# Altium PCB final049..PcbDoc
Units mm, origin at the board's own origin, x right, y up, seen from the top; angles counter-clockwise.
Board outline 152.4 x 101.6 mm, 2 copper layers (Top Layer, Bottom Layer); 18 components, 46 nets, 149 pads, 0 vias.
Unrouted connection lines stored in the file: 6.
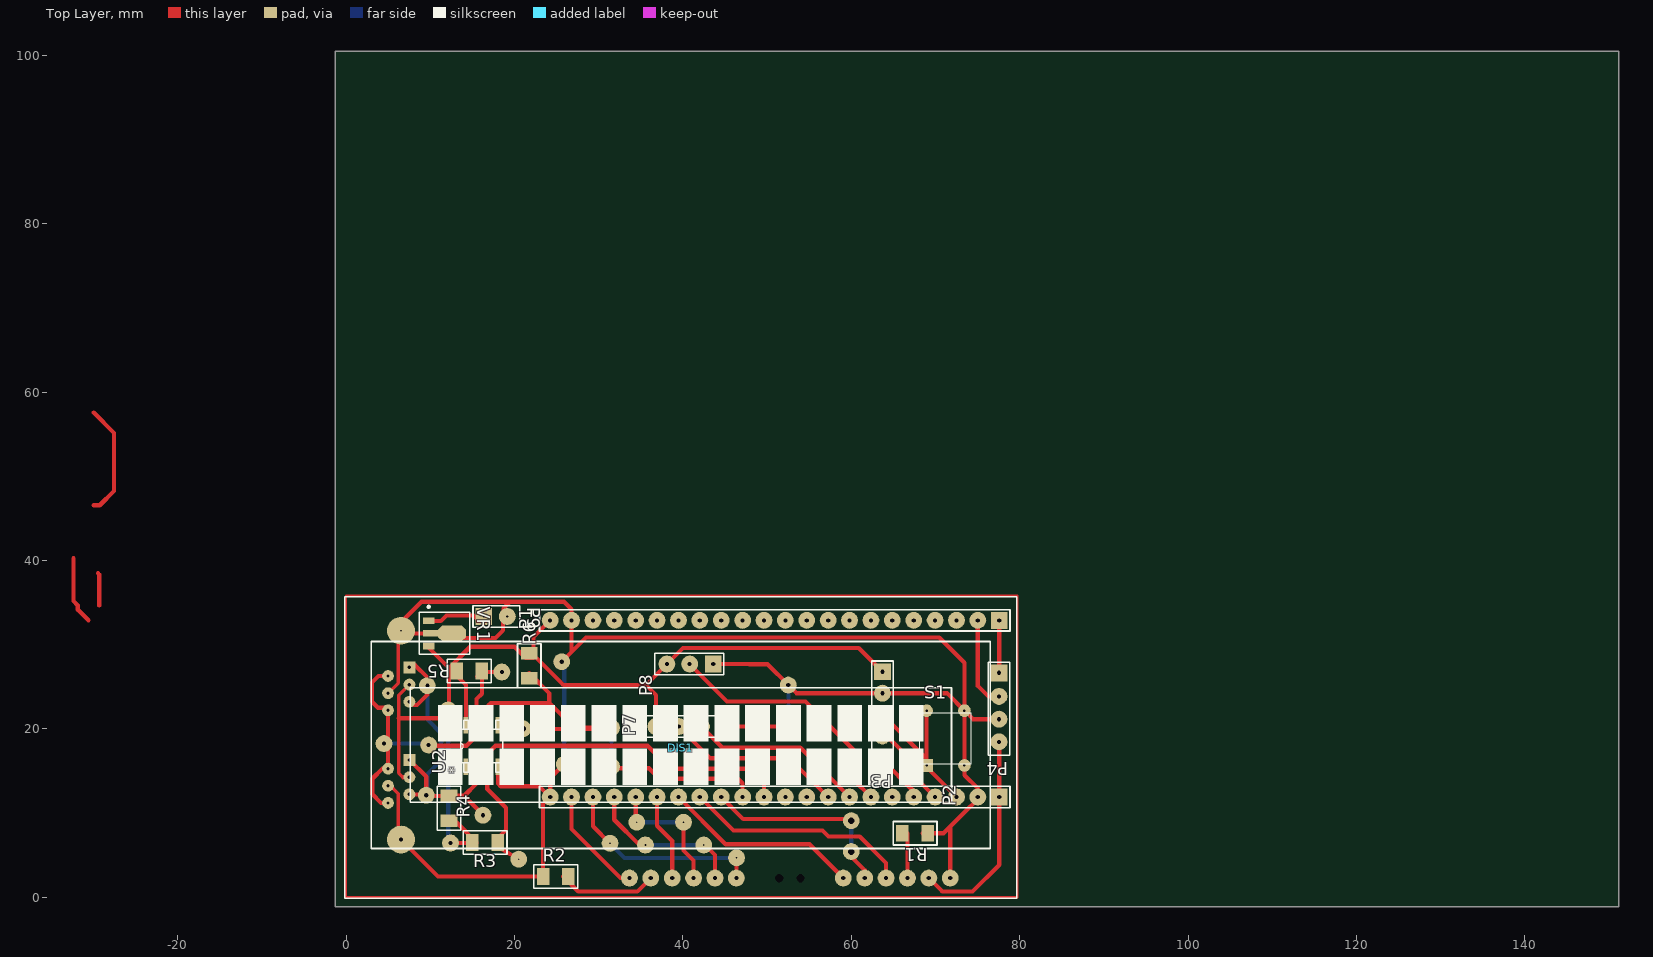
[diagram p0: Top Layer view]
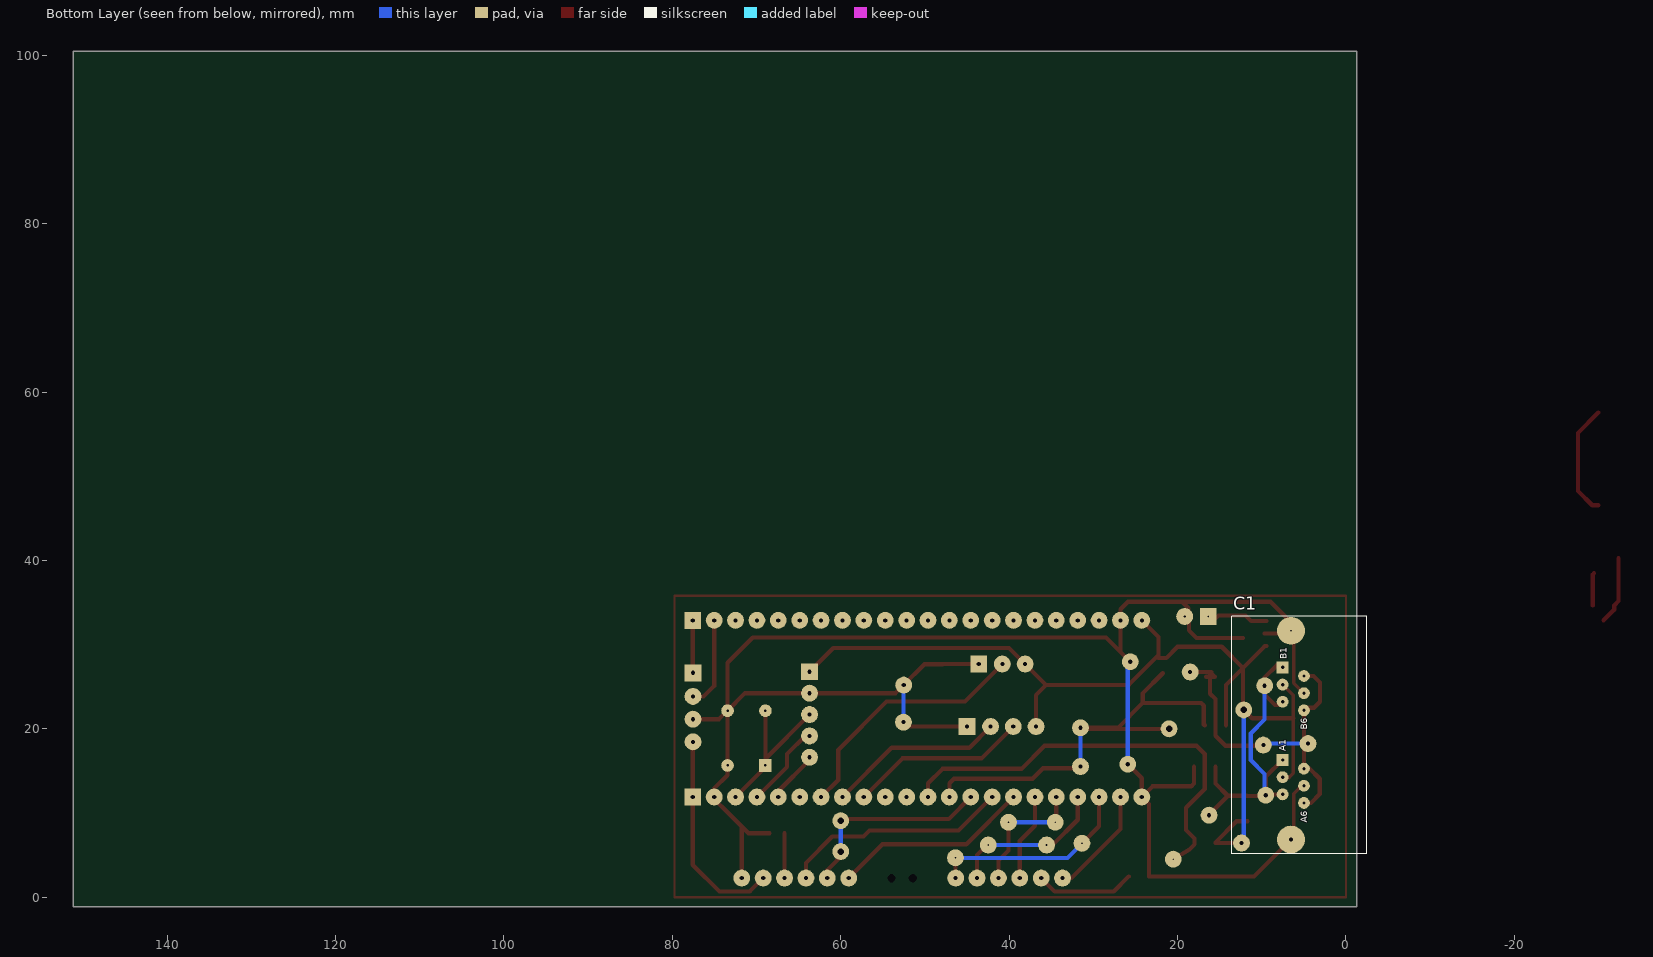
[diagram p1: Bottom Layer view, seen from below]

## Layer stack, top to bottom
Top Solder: solder mask 0.0102, Solder Resist, Dk 3.5
Top Layer: signal copper 0.0356
Dielectric 1: dielectric 0.32, FR-4, Dk 4.8
Bottom Layer: signal copper 0.0356
Bottom Solder: solder mask 0.0102, Solder Resist, Dk 3.5

## Board outline
-1.27,-1.143 151.13,-1.143 151.13,100.457 -1.27,100.457

## Design rules (kind name [scope] priority, off if disabled: settings)
Clearance [All] p1: gap=0.254
PolygonConnect [All] p1: connectstyle=Relief reliefconductorwidth=0.254 reliefentries=4 polygonreliefangle="90 Angle" airgapwidth=0.254
RoutingVias [All] p1: holewidth=0.711 width=1.27 viastyle="Through Hole" minholewidth=0.711 minwidth=1.27 maxholewidth=0.711 maxwidth=1.27
SolderMaskExpansion [All] p1: expansion=0.102
Width [All] p1: maxlimit=1 minlimit=0.254 preferedwidth=0.5 minimp=50.000000 maximp=50.000000 favimp=50.000000
30 further rules are at their usual default settings.

## Components (designator, comment, footprint, x,y, rotation, side; value= is the part's Value field where it differs from the comment)
C1 "" 615012149421 6.25,19.25 r90 bottom locked
DIS1 "Tuxgraphics LCD display 16x2 characters reflective, without background light   Source: tuxgr_12x2_r2.pdf" TUXGR_16X2_R2 39.751,17.78 r180 top locked
P1 "Header 22" HDR1X22 77.573,32.887 r180 top locked
P2 "Header 22" HDR1X22 77.573,11.907 r180 top locked
P3 "Header 5" HDR1X5 63.702,26.779 r270 top
P4 "UART" HDR1X4 77.545,26.652 r270 top
P7 "HC" HDR1X4 45,20.275 r180 top
P8 "LM" HDR1X3 43.6,27.7 r180 top
P9 "VIN" HDR1X2 16.35,33.35 r0 top
R1 "R" R1206-0.55 67.575,7.6 r180 top
R2 "R" R1206-0.55 24.9,2.45 r0 top
R3 "R" R1206-0.55 16.5,6.5 r180 top
R4 "R" R1206-0.55 12.225,10.575 r270 top
R5 "R" R1206-0.55 14.625,26.875 r180 top
R6 "R" R1206-0.55 21.75,27.5 r90 top
S1 "" 4301x60437x6 71.195,18.905 r90 top
U2 "P82B715_D_8" D8 16.129,17.953 r90 top
VR1 "Volt Reg" SOT89/X.8 11.2,31.35 r270 top

## Footprints (in the part's own frame and the unit in brackets; to place one, negate y for a bottom-side part, rotate by r counter-clockwise, add the part's x,y. Pads: shape width x height; smd on the part's side, far side on the other; paste and mask are expansions set on the pad)
4301x60437x6 [mm] "6*6mm vertical type, THT, height 4.3mm, salmon actuator 360gf, Bulk"
  rect 1.5x1.5 hole 0.3: 1(-3.25,2.25)
  round 1.5 hole 0.3: 2(-3.25,-2.25) 3(3.25,2.25) 4(3.25,-2.25)
  silkscreen extent -3.04,-3.04 3.04,3.04, body extent -3.95,-3.1 3.95,3.1, height 4.31
615012149421 [mm] "WR-MJ_Modular Jack_Tab UP_6P6C  Pre-Assembly 1x2"
  rect 1.4x1.4 hole 0.4: A1(-2.95,1.27) B1(8.05,1.27)
  round 1.4 hole 0.4: A2(-3.97,-1.27) A3(-4.99,1.27) A4(-6.01,-1.27) A5(-7.03,1.27) A6(-8.05,-1.27) B2(7.03,-1.27) B3(6.01,1.27) B4(4.99,-1.27) B5(3.97,1.27) B6(2.95,-1.27)
  round 3.3 hole 0.5: Z1(-12.4,0.27)
  round 3.3 hole 0.2: Z2(12.4,0.27)
  round 2.8 smd: ""(-12.4,0.27)
  silkscreen extent -14.1,-8.7 14.1,7.3, body extent -14.1,-8.7 14.01,7.3, height 15.41
D8 [mil]
  rect 78x22 smd: 1(-97,75) 2(-97,25) 3(-97,-25) 4(-97,-75) 5(97,-75) 6(97,-25) 7(97,25) 8(97,75)
  silkscreen extent -122,-98 122,99
HDR1X2 [mm] "Connector; Header; 2 Position"
  rect 2x2 hole 0.2: 1(0,0)
  round 2 hole 0.27: 2(2.8,0)
  silkscreen extent -1.27,-1.27 4.28,1.27
HDR1X3 [mm] "Connector; Header; 3 Position"
  rect 2x2 hole 0.5: 1(0,0)
  round 2 hole 0.5: 2(2.8,0) 3(5.5,0)
  silkscreen extent -1.27,-1.27 6.95,1.27
HDR1X4 [mm] "Connector; Header; 4 Position"
  rect 2x2 hole 0.5: 1(0,0)
  round 2 hole 0.5: 2(2.8,0) 3(5.5,0) 4(8.2,0)
  silkscreen extent -1.27,-1.27 9.77,1.27
HDR1X5 [mm] "Connector; Header; 5 Position"
  rect 2x2 hole 0.5: 1(0,0)
  round 2 hole 0.5: 2(2.54,0) 3(5.08,0) 4(7.62,0) 5(10.16,0)
  silkscreen extent -1.27,-1.27 11.43,1.27
HDR1X22 [mm] "Connector; Header; 22 Position"
  rect 2x2 hole 0.5: 1(0,0)
  round 2 hole 0.5: 2(2.54,0) 3(5.08,0) 4(7.62,0) 5(10.16,0) 6(12.7,0) 7(15.24,0) 8(17.78,0) 9(20.32,0) 10(22.86,0) 11(25.4,0) 12(27.94,0) 13(30.48,0) 14(33.02,0) 15(35.56,0) 16(38.1,0) 17(40.64,0) 18(43.18,0) 19(45.72,0) 20(48.26,0) 21(50.8,0) 22(53.34,0)
  silkscreen extent -1.27,-1.27 54.61,1.27
R1206-0.55 [mm] "Resistor Chip 1206 Height 0.55mm"
  rect 1.5x2 smd: 1(-1.5,0) 2(1.5,0)
  silkscreen extent -2.6,-1.4 2.6,1.4, body extent -1.6,-0.8 1.6,0.8, height 0.56
SOT89/X.8 [mm] "SOT-89; Body 4.6 x 4.25 mm, inc. leads (LxW max)"
  oct 1.85x3.3 smd: 0(0,1.388)
  rect 0.8x1.35 smd: 1(-1.5,-1.388) 3(1.5,-1.388)
  rect 0.75x1.8 smd: 2(0,-1.163)
  silkscreen extent -3.27,-2.51 2.5,3.49
TUXGR_16X2_R2 [mm]
  rect 0x0 on Mech1: 1(-37.5,-15.5) 1(-37.5,15.5) 1(37.5,-15.5) 1(37.5,15.5) 7(-16.76,15.5) 10(-9.14,15.5)
  round 2 hole 0.5: 1(-32,15.5) 2(-29.46,15.5) 3(-26.92,15.5) 4(-24.38,15.5) 5(-21.84,15.5) 6(-19.3,15.5) 11(-6.6,15.5) 12(-4.06,15.5) 13(-1.52,15.5) 14(1.02,15.5) 15(3.56,15.5) 16(6.1,15.5)
  round 0 hole 1: 8(-14.22,15.5) 9(-11.68,15.5)
  silkscreen extent -39.9,-17.9 39.9,17.9

## Part data
C1: library part "WE-Modular Jack 615012149421", "WR-MJ_Modular Jack_Tab UP_6P6C"
DIS1: library part TUXGR_16X2_R2
P1 P2: "Header, 22-Pin"
P3: "Header, 5-Pin"
P4 P7: library part "Header 4", "Header, 4-Pin"
P8: library part "Header 3", "Header, 3-Pin"
P9: library part "Header 2", "Header, 2-Pin"
R1 R2 R3 R4 R5 R6: "Resistor, generic"
S1: library part "WS-TATV, 430186043716", "WS-TATV 6x6 mm THT"
VR1: "Voltage Regulator"

## Free pads (board coordinates)
  round 2 hole 0.5: 2(31.525,15.525) 3(31.525,20.125) 5(25.6,27.975) 6(25.9,15.8) 7(12.399,6.44) 15(52.525,25.2) 16(52.55,20.8) 36(9.8,18.075) 37(4.5,18.25) 38(9.65,25.125) 39(9.525,12.125) 40(16.25,9.75) 43(18.5,26.75)
  round 2 hole 0.762: 21(60,5.425) 22(60,9.1) 34(21,20) 35(12.125,22.25)
  round 2 hole 0.2: 23(40.075,8.9) 24(42.475,6.2) 25(46.375,4.675) 26(34.525,8.9) 27(35.55,6.2) 28(31.35,6.4) 33(20.5,4.525)

## Nets (pads, with @x,y where several pads share a name; then routed paths per layer and width w, separated by ;. In a path a pad name is that pad's centre, name@x,y a point inside that pad or via, vN(x,y) a via of type N, cw(c..) or ccw(c..) an arc to the next point about the centre after c; other vN are vias at no path point)
ECHO: P2.8 P7.2 | length 21.1
  Top Layer w0.5: P7.2 44.725,17.75 53.95,17.75 P2.8
GND: C1.A4 C1.B4 C1.Z1 C1.Z2 DIS1.1@71.751,2.28 P1.21 P2.2 P2.22 P3.2 P4.3 P7.1 P8.1 P9.2 pad.5 pad.6 pad.15 pad.16 R1.1 R2.1 S1.2 S1.4 U2.4 VR1.0 VR1.2 | length 290.2
  Top Layer w0.254: 0,0 0,35.814
  Top Layer w0.4: C1.A4@4.98,13.52 6.184,12.316 C1.Z1@6.184,7.186 ; C1.B4 6.184,25.444 C1.Z2@6.184,30.934
  Top Layer w0.5: -32.385,40.259 -32.385,35.177 -31.873,34.665 -31.873,34.159 -30.607,32.893 ; C1.A4@4.935,13.435 4.935,13.195 C1.A4 C1.A4@4.98,13.52 ; C1.Z2@5.158,31.75 5.61,31.75 7.538,33.678 8.96,35.1 19.475,35.1 ; C1.Z1@6.184,7.186 C1.Z1 10.92,2.45 R2.1 23.4,11.074 P2.22 ; C1.Z2@6.184,30.934 6.52,31.27 C1.Z2 6.845,31.325 VR1.2@9.662,31.325 ; VR1.0@12.213,30.8 17.75,30.8 18.65,31.7 P9.2@18.65,32.75 ; 18.035,13.933 18.035,13.504 18.368,13.171 22.969,13.171 P2.22 ; P9.2@18.7,33.075 18.7,34.325 19.475,35.1 ; P2.22@23.697,11.412 P2.22@23.975,11.69 ; pad.5 26.773,29.148 ; pad.6 24.233,14.133 P2.22 ; P8.1 47.875,27.7 47.9,27.675 50.05,27.675 pad.15 53.486,24.239 P3.2 71.361,24.239 S1.4 ; P7.1 52.025,20.275 pad.16 ; R1.1@68.475,7.6 70.95,7.6 71.751,8.401 ; DIS1.1@71.756,2.275 71.751,2.28 71.751,8.401 ; 74.187,10.837 71.751,8.401 ; P4.3 74.448,21.152 S1.4 ; 19.475,35.1 25.875,35.1 26.773,34.202 P1.21 26.773,29.148 ; 26.773,29.148 28.475,30.85 70.45,30.85 73.445,27.855 S1.4 ; 71.751,8.401 75.033,11.683 P2.2 75.033,12.908 73.445,14.496 S1.2 S1.4
  Top Layer w0.508: U2.4 U2.4 18.035,13.933
  Bottom Layer w0.5: pad.5 25.9,27.675 pad.6 ; pad.15 52.55,25.175 pad.16
LCL: C1.A2 C1.A6 C1.B2 C1.B6 pad.36 pad.37 pad.43 R5.1 U2.7 | length 44.1
  Top Layer w0.5: C1.A6 4.15,11.2 3.1,12.25 3.1,14.075 4.305,15.28 C1.A2 C1.B6 4.98,22.5 3.8,22.5 3.075,23.225 3.075,25.5 3.855,26.28 C1.B2 ; pad.36@9.8,17.997 14.304,17.997 15.494,19.187 U2.7 ; 15.494,23.544 16.125,24.175 16.125,26.738 15.587,26.2 R5.1@16.575,26.2 ; R5.1@16,26.75 pad.43
  Top Layer w0.508: U2.7 15.494,23.544
  Bottom Layer w0.5: pad.37 9.625,18.25 pad.36
LDA: C1.A1 C1.A5 C1.B1 C1.B5 pad.38 pad.39 pad.40 R4.1 U2.2 | length 41.2
  Top Layer w0.5: C1.B5@7.475,23.145 7.475,23.425 8.05,22.85 8.425,22.85 9.65,24.075 9.65,26.1 8.2,27.55 7.8,27.55 C1.B1@7.475,27.225 ; C1.A5 9.43,12.22 pad.39 9.525,14.311 7.536,16.3 C1.A1 ; pad.39@9.661,12.039 R4.1@11.764,12.039 ; 14.021,12.05 15.5,10.571 pad.40
  Top Layer w0.508: R4.1@11.764,12.05 14.021,12.05 15.494,13.523 U2.2
  Bottom Layer w0.5: pad.39 9.65,12.25 9.65,14.65 11.304,16.304 11.304,19.446 9.65,21.1 pad.38
NetDIS1_3: DIS1.3 R1.2 | length 5.3
  Top Layer w0.5: DIS1.3 66.675,2.284 R1.2@66.675,7.6
NetDIS1_15: DIS1.15 R2.2 | length 11.8
  Top Layer w0.5: R2.2@25.8,2.45 27.575,0.675 34.586,0.675 DIS1.15
NetP9_1: P9.1 VR1.1 | length 7
  Top Layer w0.5: VR1.1@9.437,32.8 11.25,32.8 11.925,33.475 15.125,33.475 P9.1@15.85,32.75
OUT: P2.7 P8.2 | length 30.2
  Top Layer w0.5: P8.2 45.25,23.25 54.55,23.25 60.3,17.5 60.3,13.94 P2.7
P0_0: P1.5
P0_1: P1.6
P0_2: P1.7
P0_3: P1.8
P0_4: P1.9
P0_5: P1.10
P0_6: P1.11
P0_7: P1.12
P1_0: P1.13
P1_1: P1.14
P1_2: P1.15
P1_3: P1.16
P1_4: P1.17
P1_5: P1.18
P1_6: P1.19
P1_7: P1.20
P2_0: DIS1.16 P2.21 | length 13.1
  Top Layer w0.5: P2.21 26.773,8.102 32.595,2.28 DIS1.16
P2_1: DIS1.11 P2.20 pad.25 pad.28 | length 24.5
  Top Layer w0.5: P2.20 29.313,8.437 pad.28 ; DIS1.11 46.351,4.651 pad.25
  Bottom Layer w0.5: pad.28 33.075,4.675 pad.25
P2_2: DIS1.12 P2.19 pad.24 pad.27 | length 19.2
  Top Layer w0.5: P2.19 31.853,9.197 34.825,6.225 pad.27@35.55,6.225 ; pad.24@42.475,6.35 43.811,5.014 DIS1.12
  Bottom Layer w0.5: pad.27 pad.24
P2_3: DIS1.13 P2.18 pad.23 pad.26 | length 16
  Top Layer w0: pad.23@40.075,8.975 40.112,8.931 pad.23@40.365,8.632
  Top Layer w0.5: P2.18 34.393,9.332 pad.26@34.525,9.2 ; pad.23@40.075,8.975 pad.23 40.075,5.55 41.271,4.354 DIS1.13
  Bottom Layer w0.5: pad.26 pad.23
P2_4: DIS1.14 P2.17 | length 10.4
  Top Layer w0.5: P2.17 36.933,8.492 38.731,6.694 DIS1.14
P2_5: DIS1.6 P2.16 | length 23.6
  Top Layer w0.5: P2.16 45.08,6.3 55.031,6.3 DIS1.6
P2_6: DIS1.4 P2.15 | length 27.2
  Top Layer w0.5: P2.15 45.995,7.925 56.575,7.925 57.3,7.2 61,7.2 64.131,4.069 DIS1.4
P2_7: DIS1.5 P2.14 pad.21 pad.22 | length 24.3
  Top Layer w0.5: P2.14 47.16,9.3 pad.22@60,9.3 ; pad.21@59.4,5.425 61.591,3.234 DIS1.5
  Bottom Layer w0.5: pad.21 pad.22
P3_2: P2.11
P3_3: P2.10
P3_7: P2.6
P4_2: P1.3
P4_3: P1.4
RX: P1.1 P4.1 | length 6.2
  Top Layer w0.5: P4.1 77.573,26.68 P1.1
SCL: P2.13 pad.2 pad.3 pad.34 R6.1 U2.6 | length 56.1
  Top Layer w0.5: U2.6 16.879,20.531 16.879,22.755 17.19,23.066 24.134,23.066 ; pad.34 31.4,20 pad.3@31.521,20.121 ; R6.1@21.75,26.6 24.134,24.216 24.134,23.066 ; pad.2 31.725,15.325 35.964,15.325 37.21,14.079 46.557,14.079 47.093,13.543 P2.13 ; 24.134,23.066 27.079,20.121 pad.3@31.521,20.121 ; pad.3@31.521,20.121 pad.3 31.525,20.121 pad.3@31.521,20.121
  Bottom Layer w0.5: pad.2 pad.3
SDA: P2.12 pad.33 R3.1 U2.3 | length 52
  Top Layer w0.5: pad.33 18.575,5.675 17.963,6.287 17.963,6.963 19,8 19,10.634 16.764,12.87 U2.3 16.764,17.028 17.733,17.997 35.781,17.997 38.528,15.25 47.926,15.25 49.633,13.543 P2.12
SWDCLK: P2.4 P3.4 | length 10.1
  Top Layer w0.5: P3.4 64.21,19.159 66.369,17 66.369,15.491 P2.4
SWDIO: P2.5 P3.5 | length 6.1
  Top Layer w0.5: P3.5 63.702,16.298 67.413,12.587 P2.5@67.413,12.034
TRIG: P2.9 P7.3 | length 21.2
  Top Layer w0.5: P7.3 43.275,16.5 52.66,16.5 P2.9
TX: P1.2 P4.2 | length 10.8
  Top Layer w0.5: P1.2 75.033,25.1 76.281,23.852 P4.2
VCC: C1.A3 C1.B3 DIS1.2 P1.22 P2.1 P3.1 P4.4 P7.4 P8.3 pad.7 pad.35 R3.2 R4.2 R5.2 R6.2 U2.8 VR1.3 | length 250.5
  Top Layer w0.254: 0,0 79.756,0
  Top Layer w0.4: 6.74,14.26 6.25,14.75 6.25,21.25 6.25,23.99 C1.B3
  Top Layer w0.5: -29.972,46.564 -29.255,46.564 -27.559,48.26 -27.559,55.151 -29.972,57.564 ; -29.475,38.481 -29.333,38.339 -29.333,34.665 ; 6.25,21.25 11.125,21.25 pad.35 ; 6.74,14.26 C1.A3 ; VR1.3@9.437,29.825 9.625,29.825 12.225,27.225 ; R4.2@11.675,9.025 12.989,9.025 15.5,6.514 15.5,6.44 pad.7 ; pad.35@12.225,22.118 12.225,27.225 ; U2.8 14.224,25.226 12.225,27.225 ; 19.9,29.75 14.75,29.75 12.225,27.225 ; 20,29.75 21.325,28.425 22.25,28.425 22.25,30.904 P1.22 ; R6.2@22.25,29.75 22.25,28.75 25.8,25.2 35.6,25.2 ; P7.4 36.8,24 35.6,25.2 ; P3.1 60.881,29.6 40,29.6 P8.3 35.6,25.2 ; DIS1.2 70.816,0.675 74.4,0.675 77.573,3.848 P2.1 P4.4@77.573,18.452
  Bottom Layer w0.5: pad.35 12.125,6.714 pad.7
XRES: P2.3 P3.3 S1.1 S1.3 | length 19.1
  Top Layer w0.5: P3.3 68.945,16.456 ; S1.3 68.945,16.456 ; P2.3 68.945,15.455 S1.1 68.945,16.456
pads on no net: C1. DIS1.1@2.251,2.28 DIS1.1@2.251,33.28 DIS1.1@77.251,2.28 DIS1.1@77.251,33.28 DIS1.7 DIS1.8 DIS1.9 DIS1.10 U2.1 U2.5
copper on no net: | length 115.8
  Top Layer w0.254: 0,35.814 79.756,35.814 79.756,0
  Top Layer w0.5: 33.481,2.45 33.651,2.28

## Text inside footprints (layer, text, board x,y; h text height)
C1: Bottom Overlay "B6" at 4.599,19.885 h0.8 r270; Bottom Overlay "B1" at 7.012,28.267 h0.8 r270; Bottom Overlay "A6" at 4.599,8.836 h0.8 r270; Bottom Overlay "A1" at 7.139,17.345 h0.8 r270
U2: Top Overlay "*" at 13.792,14.651 h1.97 r90; Mechanical 16 "*" at 13.792,14.651 h1.97 r90